# Altium PCB Board_Layout.PcbDoc (part 2 of 2)
Units mil, origin at the board's own origin, x right, y up, seen from the top; angles counter-clockwise.
Board outline 4005 x 2010 mil, 4 copper layers (Top Layer, Power, Ground, Bottom Layer); 140 components, 129 nets, 567 pads, 245 vias.
Unrouted connection lines stored in the file: 278.
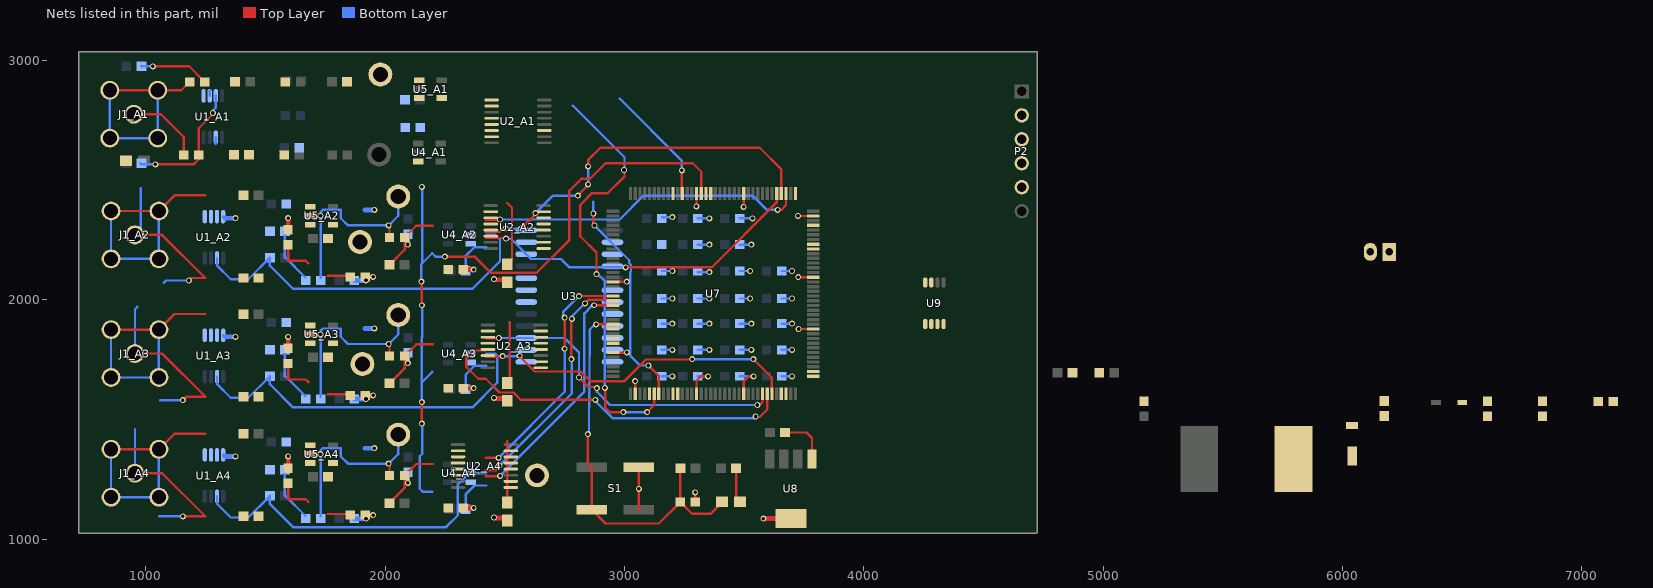
[diagram p4: the nets of this part, all layers, seen from the top]

## Via types
v1: diameter 25, hole 15, Top Layer to Bottom Layer, tented both sides, 89 vias
v2: diameter 25, hole 15, Ground to Bottom Layer, tented bottom, 55 vias
v3: diameter 25, hole 15, Top Layer to Ground, tented top, 39 vias
v4: diameter 25, hole 15, Top Layer to Power, tented top, 33 vias
v5: diameter 25, hole 15, Power to Bottom Layer, tented bottom, 29 vias

## Nets (pads, with @x,y where several pads share a name; then routed paths per layer and width w, separated by ;. In a path a pad name is that pad's centre, name@x,y a point inside that pad or via, vN(x,y) a via of type N, cw(c..) or ccw(c..) an arc to the next point about the centre after c; other vN are vias at no path point) (continued)
AGND_A2: C1_A2.1 C5_A2.1 C6_A2.1 C7_A2.1 C8_A2.1 D1_A2.1 R3_A2.1 T2_A2.1 U1_A2.4 U2_A2.2 U2_A2.4 U2_A2.5 U2_A2.6 U4_A2.2 U5_A2.2 | length 357.7
  Top Layer w20: C6_A2.1@1595,2292.01 v3(1595,2340.51) ; U5_A2.2@1687.76,2350.51 v3(1730,2350.51) ; C8_A2.1@1916.5,2095.51 v3(1950,2095.51) ; v3@2457.4,2083.11 D1_A2.1@2510,2083.11
  Bottom Layer w10: U1_A2.4@1323.39,2347.13 U1_A2.4@1330,2340.51
  Bottom Layer w20: U1_A2.4@1330,2340.51 v2(1375,2340.51) ; C7_A2.1@1871.5,2080.51 v2(1920,2080.51) ; 1915,2375 v2@1954.49,2375 ; v2@2095,2235.51 C1_A2.1@2095,2274.02
  other v2: 2095,2230.51 1955,2375.51
  other v3: 2455,2085.51
AGND_A3: C1_A3.1 C5_A3.1 C6_A3.1 C7_A3.1 C8_A3.1 D1_A3.1 R3_A3.1 T2_A3.1 U1_A3.4 U2_A3.2 U2_A3.4 U2_A3.5 U2_A3.6 U4_A3.2 U5_A3.2 | length 357.7
  Top Layer w20: C6_A3.1@1595,1796.5 v3(1595,1845) ; U5_A3.2@1687.76,1855 v3(1730,1855) ; C8_A3.1@1916.5,1600 v3(1950,1600) ; v3@2457.4,1587.6 D1_A3.1@2510,1587.6
  Bottom Layer w10: U1_A3.4@1323.39,1851.61 U1_A3.4@1330,1845
  Bottom Layer w20: U1_A3.4@1330,1845 v2(1375,1845) ; C7_A3.1@1871.5,1585 v2(1920,1585) ; 1915,1879.49 v2@1954.49,1879.49 ; v2@2095,1740 C1_A3.1@2095,1778.5
  other v2: 2095,1735 1955,1880
  other v3: 2455,1590
AGND_A4: C1_A4.1 C5_A4.1 C6_A4.1 C7_A4.1 C8_A4.1 D1_A4.1 R3_A4.1 T2_A4.1 U1_A4.4 U2_A4.2 U2_A4.4 U2_A4.5 U2_A4.6 U4_A4.2 U5_A4.2 | length 357.7
  Top Layer w20: C6_A4.1@1595,1296.5 v3(1595,1345) ; U5_A4.2@1687.76,1355 v3(1730,1355) ; C8_A4.1@1916.5,1100 v3(1950,1100) ; v3@2457.4,1087.6 D1_A4.1@2510,1087.6
  Bottom Layer w10: U1_A4.4@1323.39,1351.61 U1_A4.4@1330,1345
  Bottom Layer w20: U1_A4.4@1330,1345 v2(1375,1345) ; C7_A4.1@1871.5,1085 v2(1920,1085) ; 1915,1379.49 v2@1954.49,1379.49 ; v2@2095,1240 C1_A4.1@2095,1278.5
  other v2: 2095,1235 1955,1380
  other v3: 2455,1090
C\S\_\P\O\T\: U3.11 U7.100
NetC2_A1_1: C2_A1.1 J1_A1.2 | length 948
  Top Layer w10: J1_A1.2@850,2875 J1_A1.2@1050,2875 1148.5,2875 C2_A1.1@1183.5,2910
  Bottom Layer w10: J1_A1.2@850,2875 J1_A1.2@850,2675 J1_A1.2@1050,2675 J1_A1.2@1050,2875
NetC2_A1_2: C2_A1.2 R1_A1.2 U1_A1.2 | length 315.6
  Top Layer w10: v1(1030,2975) 1181.5,2975 1241.5,2915 C2_A1.2@1251.5,2915
  Bottom Layer w10: R1_A1.2@981.5,2975 v1(1030,2975) ; U1_A1.2@1267.2,2851.61 U1_A1.2@1267.2,2872.38
NetC2_A2_1: C2_A2.1 J1_A2.2 | length 1249.8
  Top Layer w10: J1_A2.2@855,2370.51 J1_A2.2@1055,2370.51 1120,2435.51 1248.5,2435.51
  Bottom Layer w10: J1_A2.2@855,2370.51 J1_A2.2@855,2170.51 J1_A2.2@1055,2170.51 J1_A2.2@1055,2370.51 ; 1581.5,2285.51 1581.5,2175.51 1583.5,2175.51 C2_A2.1@1666.5,2092.52
NetC2_A2_2: C2_A2.2 R1_A2.2 U1_A2.2 | length 799.2
  Top Layer w10: v1(2015,2310.51) 2018.5,2307.01 2018.5,2260.51
  Bottom Layer w10: C2_A2.2@1731.5,2090.51 1731.5,2367.01 1739.49,2375 1765,2375 1815,2375 1815,2340.51 1845,2310.51 v1(2015,2310.51) 2055,2350.51 2055,2431.5
NetC2_A3_1: C2_A3.1 J1_A3.2 | length 1249.8
  Top Layer w10: J1_A3.2@855,1875 J1_A3.2@1055,1875 1120,1940 1248.5,1940
  Bottom Layer w10: J1_A3.2@855,1875 J1_A3.2@855,1675 J1_A3.2@1055,1675 J1_A3.2@1055,1875 ; 1581.5,1790 1581.5,1680 1583.5,1680 C2_A3.1@1666.5,1597.01
NetC2_A3_2: C2_A3.2 R1_A3.2 U1_A3.2 | length 799.2
  Top Layer w10: v1(2015,1815) 2018.5,1811.5 2018.5,1765
  Bottom Layer w10: C2_A3.2@1731.5,1595 1731.5,1871.5 1739.49,1879.49 1765,1879.49 1815,1879.49 1815,1845 1845,1815 v1(2015,1815) 2055,1855 2055,1935.98
NetC2_A4_1: C2_A4.1 J1_A4.2 | length 1249.8
  Top Layer w10: J1_A4.2@855,1375 J1_A4.2@1055,1375 1120,1440 1248.5,1440
  Bottom Layer w10: J1_A4.2@855,1375 J1_A4.2@855,1175 J1_A4.2@1055,1175 J1_A4.2@1055,1375 ; 1581.5,1290 1581.5,1180 1583.5,1180 C2_A4.1@1666.5,1097.01
NetC2_A4_2: C2_A4.2 R1_A4.2 U1_A4.2 | length 799.2
  Top Layer w10: v1(2015,1315) 2018.5,1311.5 2018.5,1265
  Bottom Layer w10: C2_A4.2@1731.5,1095 1731.5,1371.5 1739.49,1379.49 1765,1379.49 1815,1379.49 1815,1345 1845,1315 v1(2015,1315) 2055,1355 2055,1435.98
NetC3_A1_1: C3_A1.1 J1_A1.1 | length 322.9
  Top Layer w10: J1_A1.1@950,2775 1063.5,2775 1158.5,2680 C3_A1.1@1158.5,2605
NetC3_A1_2: C3_A1.2 R2_A1.1 U1_A1.3 | length 545.6
  Top Layer w10: v1(1040,2565) 1200,2565 1221.5,2586.5 C3_A1.2@1221.5,2605 1221.5,2716.5 v1@1280,2775
  Bottom Layer w10: R2_A1.1@976.5,2570 981.5,2565 v1(1040,2565) ; v1(1280,2780) 1280,2790 1292.8,2802.8 U1_A1.3@1292.8,2851.61
NetC3_A2_1: C3_A2.1 J1_A2.1 | length 754.7
  Top Layer w10: J1_A2.1@955,2270.51 1068.5,2270.51 1248.5,2090.51 1190.51,2090.51 v1(1180,2080)
  Bottom Layer w10: J1_A2.1@955,2270.51 979.88,2295.39 979.88,2465 ; 1075.12,2070 1085.12,2080 v1(1180,2080)
NetC3_A2_2: C3_A2.2 R2_A2.1 U1_A2.3 | length 279.4
  Top Layer w10: 2018.5,2145.51 2081.5,2208.5 C3_A2.2@2081.5,2260.51 2129.88,2308.9 2199.76,2308.9
NetC3_A3_1: C3_A3.1 J1_A3.1 | length 761.8
  Top Layer w10: J1_A3.1@955,1775 1068.5,1775 1248.5,1595 1170,1595 v1(1155,1580)
  Bottom Layer w10: J1_A3.1@955,1775 955,1960.12 964.88,1970 ; 1060.12,1580 v1(1155,1580)
NetC3_A3_2: C3_A3.2 R2_A3.1 U1_A3.3 | length 279.4
  Top Layer w10: 2018.5,1650 2081.5,1712.99 C3_A3.2@2081.5,1765 2129.88,1813.39 2199.76,1813.39
NetC3_A4_1: C3_A4.1 J1_A4.1 | length 746.3
  Top Layer w10: J1_A4.1@955,1275 1068.5,1275 1248.5,1095 v1(1155,1095)
  Bottom Layer w10: J1_A4.1@955,1275 955,1459.88 ; 1055.12,1095 v1(1155,1095)
NetC3_A4_2: C3_A4.2 R2_A4.1 U1_A4.3 | length 279.4
  Top Layer w10: 2018.5,1150 2081.5,1212.99 C3_A4.2@2081.5,1265 2129.88,1313.39 2199.76,1313.39
NetC4_A1_2: C4_A1.2 R3_A1.2 U2_A1.3
NetC4_A2_2: C4_A2.2 R3_A2.2 U2_A2.3
NetC4_A3_2: C4_A3.2 R3_A3.2 U2_A3.3
NetC4_A4_2: C4_A4.2 R3_A4.2 U2_A4.3
NetC6_A1_2: C6_A1.2 R8_A1.2 U5_A1.1
NetC6_A2_2: C6_A2.2 R8_A2.2 U5_A2.1 | length 156.2
  Top Layer w10: C6_A2.2@1595,2229.02 1595,2162.01 1668.74,2162.01 1679.65,2151.1
NetC6_A3_2: C6_A3.2 R8_A3.2 U5_A3.1 | length 156.2
  Top Layer w10: C6_A3.2@1595,1733.5 1595,1666.5 1668.74,1666.5 1679.65,1655.59
NetC6_A4_2: C6_A4.2 R8_A4.2 U5_A4.1 | length 156.2
  Top Layer w10: C6_A4.2@1595,1233.5 1595,1166.5 1668.74,1166.5 1679.65,1155.59
NetC8_A1_2: C8_A1.2 U5_A1.4
NetC8_A2_2: C8_A2.2 U5_A2.4 | length 95
  Top Layer w10: 1760.35,2099.92 1849.09,2099.92 C8_A2.2@1853.5,2095.51
NetC8_A3_2: C8_A3.2 U5_A3.4 | length 95
  Top Layer w10: 1760.35,1604.41 1849.09,1604.41 C8_A3.2@1853.5,1600
NetC8_A4_2: C8_A4.2 U5_A4.4 | length 95
  Top Layer w10: 1760.35,1104.41 1849.09,1104.41 C8_A4.2@1853.5,1100
NetC38_1: C38.1 D6.C U9.1
NetC38_2: C38.2 D7.C L1.1 U9.3
NetC39_1: C39.1 U9.7
NetC39_2: C39.2 R17.1
NetD1_A1_2: D1_A1.2 R7_A1.2
NetD1_A2_2: D1_A2.2 R7_A2.2 | length 272.7
  Top Layer w10: D1_A2.2@2510,2147.91 2530,2167.91 2530,2384.02 2510,2404.02
NetD1_A3_2: D1_A3.2 R7_A3.2 | length 246.1
  Top Layer w10: D1_A3.2@2520,1660 2520,1906.1
NetD1_A4_2: D1_A4.2 R7_A4.2 | length 246.1
  Top Layer w10: D1_A4.2@2510,1162.4 2510,1408.5
NetD4_2: D4.2 R12.2 | length 146.6
  Top Layer w10: R12.2@3466.5,1295 3466.5,1170.91 D4.2@3482.4,1155
NetR5_A1_1: R5_A1.1 U4_A1.3
NetR5_A2_1: R5_A2.1 U4_A2.3 | length 163.6
  Bottom Layer w10: R5_A2.1@2336.5,2120.51 2336.5,2182.01 2373.82,2219.33 2423.19,2219.33
NetR5_A3_1: R5_A3.1 U4_A3.3 | length 163.6
  Bottom Layer w10: R5_A3.1@2336.5,1625 2336.5,1686.5 2373.82,1723.82 2423.19,1723.82
NetR5_A4_1: R5_A4.1 U4_A4.3 | length 163.6
  Bottom Layer w10: R5_A4.1@2336.5,1125 2336.5,1186.5 2373.82,1223.82 2423.19,1223.82
NetR8_A1_1: R8_A1.1 U5_A1.3
NetR8_A2_1: R8_A2.1 U5_A2.3
NetR8_A3_1: R8_A3.1 U5_A3.3
NetR8_A4_1: R8_A4.1 U5_A4.3
NetR9_2: R9.2 U3.10
NetR13_2: R13.2 U8.1 | length 209.3
  Top Layer w10: R13.2@3671.5,1445 3760,1445 3783.58,1421.42 U8.1@3783.58,1334.02
NetU2_A1_9: U2_A1.9
NetU2_A1_10: U2_A1.10
NetU2_A2_9: U2_A2.9
NetU2_A2_10: U2_A2.10
NetU2_A3_9: U2_A3.9
NetU2_A3_10: U2_A3.10
NetU2_A4_9: U2_A4.9
NetU2_A4_10: U2_A4.10
NetU7_26: U7.26
NetU7_28: U7.28
NetU7_29: U7.29
NetU7_37: 
NetU7_41: U7.41
NetU7_46: U7.46
NetU7_47: U7.47
NetU7_69: U7.69
NetU7_70: U7.70
NetU7_73: U7.73
NetU7_74: U7.74
NetU7_100: 
NetU7_135: U7.135
R\S\T\: C37.1 D4.1 P2.5 R11.2 S1.3 U7.25 | length 1648.2
  Top Layer w10: v1(2847.05,1437.95) 2847.05,1316.1 2863.15,1300 S1.3@2863.15,1122.83 2920.98,1065 3143.5,1065 C37.1@3233.5,1155 ; v1(2882.05,1897.05) U7.25@2951.69,1897.05 ; R11.2@3233.5,1295 C37.1@3233.5,1155 ; D4.1@3407.6,1155 3407.6,1152.6 3360,1105 3283.5,1105 C37.1@3233.5,1155
  Bottom Layer w10: v1@2852.05,1437.95 2855,1875 v1@2877.05,1897.05
R\S\T\_\P\O\T\: C11.2 C12.2 C13.2 C14.2 C15.2 C16.2 C17.2 C18.2 C19.2 C20.2 C21.2 C22.2 C23.2 C24.2 C25.2 C26.2 C27.2 C28.2 C29.2 C30.2 C31.2 C32.2 C33.2 C34.2 C35.2 C36.2 C37.2 C40.2 C41.2 D7.A P2.3 P3.2 R6.1 R17.2 S1.1 U2_A1.14 U2_A2.14 U2_A3.14 U2_A4.14 U3.9 U3.15 U7.16 U7.31 U7.38 U7.51 U7.61 U7.83 U7.94 U7.101 U7.107 U7.120 U7.130 U8.5 U9.4 U9.8 | length 2158.9
  Top Layer w10: U7.31@2951.69,1778.94 v3@3008.94,1778.94 ; U7.16@2951.69,2074.21 v3@3009.21,2074.21 ; v3(3045,1660) 3045.2,1659.8 U7.38@3045.2,1606.69 ; 3060,1122.83 S1.1@3060,1300 ; C37.2@3296.5,1155 v3@3296.5,1193.5 ; U7.51@3301.1,1606.69 3301.1,1661.1 3320,1680 v1(3350,1680) ; v3@3301.1,2390 U7.130@3301.1,2443.31 ; U7.61@3497.95,1606.69 3497.95,1657.95 3520,1680 v1@3535,1680 ; v3(3497.95,2387.95) U7.120@3497.95,2443.31 ; v3@3725.2,2349.8 U7.107@3788.31,2349.8 ; v3(3726.1,2093.9) U7.94@3788.31,2093.9 ; v3(3727.36,1877.36) U7.83@3788.31,1877.36
  Top Layer w20: v3@3580.98,1085.98 U8.5@3695,1085.98
  Bottom Layer w10: C36.2@3156.5,1680 v2(3200,1680) ; C35.2@3156.5,1790 v2(3200,1790) ; C34.2@3156.5,1900 v2(3200,1900) ; C33.2@3156.5,2005 v2(3200,2005) ; C32.2@3156.5,2120 v2(3200,2120) ; C30.2@3156.5,2345 v2(3200,2345) ; C29.2@3306.5,1680 v1(3350,1680) ; C28.2@3306.5,1790 v2(3355,1790) ; C27.2@3306.5,1900 v2(3355,1900) ; C26.2@3306.5,2005 v2(3355,2005) ; C25.2@3306.5,2115 v2(3355,2115) ; C24.2@3306.5,2230 v2(3355,2230) ; C23.2@3306.5,2340 v2(3355,2340) ; C22.2@3481.5,1680 v1(3540,1680) ; C21.2@3481.5,1790 v2(3530,1790) ; C20.2@3481.5,1900 v2(3530,1900) ; C19.2@3481.5,2005 v2(3525,2005) ; C18.2@3481.5,2120 v2(3525,2120) ; C17.2@3481.5,2230 v2(3530,2230) ; C16.2@3481.5,2340 v2(3535,2340) ; C15.2@3656.5,1680 v2(3700,1680) ; C14.2@3656.5,1790 v2(3700,1790) ; C13.2@3656.5,1900 v2(3700,1900) ; C12.2@3656.5,2005 v2(3700,2005) ; C11.2@3656.5,2120 v2(3700,2120)
  other v3: 3580,1085 3295,1195 3060,1210 3010,1780 3010,2075 3725,2350 3300,2390
RGA_1: U3.22 U3.23
RGA_2: U3.3 U3.4
RGA_3: U3.18 U3.19
RGA_4: U3.7 U3.8
RGA_A1: U1_A1.1
RGA_A2: U1_A2.1
RGA_A3: U1_A3.1
RGA_A4: U1_A4.1
RGB_1: U3.24
RGB_2: U3.2
RGB_3: U3.20
RGB_4: U3.6
RGB_A1: C4_A1.1 R4_A1.2 T1_A1.1 U1_A1.6 | length 26.2
  Bottom Layer w10: U1_A1.6@1292.8,2652.2 U1_A1.6@1292.8,2678.39
RGB_A2: C4_A2.1 R4_A2.2 T1_A2.1 U1_A2.6 | length 1594.1
  Top Layer w20: C4_A2.1@2326.5,2125.51 v3(2370,2125.51)
  Bottom Layer w10: U1_A2.6@1297.8,2173.9 1297.8,2142.72 1355,2085.51 1428.5,2085.51 1518.5,2175.51 1518.5,2142.01 1615,2045.51 2365,2045.51 2480,2160.51 2480,2250.51 2460,2270.51 2423.19,2270.51
RGB_A3: C4_A3.1 R4_A3.2 T1_A3.1 U1_A3.6 | length 1594.6
  Top Layer w20: C4_A3.1@2326.5,1630 v3(2370,1630)
  Bottom Layer w10: U1_A3.6@1297.8,1678.39 1297.8,1647.2 1355,1590 1428.5,1590 1518.5,1680 1518.5,1646.5 1615,1550 2365,1550 2468.54,1653.54 2468.54,1664.64 ; 2423.19,1775 2460,1775 2468.54,1766.46 2468.54,1754.64 2468.54,1664.64 ; 2468.54,1674.64 2468.54,1664.64
RGB_A4: C4_A4.1 R4_A4.2 T1_A4.1 U1_A4.6 | length 1503.9
  Top Layer w20: C4_A4.1@2326.5,1130 v3(2370,1130)
  Bottom Layer w10: U1_A4.6@1297.8,1178.39 1297.8,1147.2 1355,1090 1428.5,1090 1518.5,1180 1518.5,1146.5 1615,1050 2255,1050 2304.17,1099.17 2304.17,1229.17 2350,1275 2423.19,1275
SCK_ADC1: U2_A1.15 U7.133 | length 505.2
  Top Layer w10: v1(3240,2540) 3240,2445.35 U7.133@3242.05,2443.31
  Bottom Layer w10: 2980,2840 3240,2580 v1(3240,2540)
SCK_ADC2: U2_A2.15 U7.111 | length 1377.2
  Top Layer w10: 2420.24,2334.49 v1@2479.49,2334.49 ; v1(3640,2375) 3655,2375 3675.12,2395.12 U7.111@3675.12,2443.31
  Bottom Layer w10: v1(2480,2335) 2980,2335 3080,2435 3535,2435 3595,2375 v1(3640,2375)
SCK_ADC3: U2_A3.15 U7.65 | length 1379.5
  Top Layer w10: 2420.24,1838.98 v1@2473.98,1838.98 ; v1(2810,1675) 2850,1635 v1@2885,1635 ; v1(3555,1560) 3565,1560 3576.69,1571.69 U7.65@3576.69,1606.69
  Bottom Layer w10: v1(2475,1840) 2750,1840 2810,1780 v1(2810,1675) ; v1(2885,1630) 2885,1615 2940,1560 v1(3555,1560)
SCK_ADC4: U2_A4.15 U7.19 | length 1004.8
  Top Layer w10: 2420.24,1338.98 v1(2473.98,1338.98) ; v1(2750,1795) v1@2750,1915 ; v1@2810,2015.16 U7.19@2951.69,2015.16
  Bottom Layer w10: v1(2473.98,1338.98) 2750,1615 v1(2750,1795) ; v1(2750,1925) 2745,1930 2745,1950 v1(2810,2015)
SCK_POT: U3.14 U7.128
SDI_ADC1: U2_A1.12 U7.43 | length 939.2
  Top Layer w10: v1(2870,2360) 2870,2315 v1(2875,2310) ; v1(3100,1725) 3143.62,1681.38 U7.43@3143.62,1606.69
  Bottom Layer w10: v1(2870,2360) 2870,2410 ; v1(2875,2310) 3020,2165 3020,2151.82 3027.5,2144.32 3027.5,2118.18 3025,2115.68 3025,1765 3065,1725 v1(3100,1725)
SDI_ADC2: U2_A2.12 U7.113 | length 1416
  Top Layer w10: 2420.24,2257.72 2502.28,2257.72 v1(2505,2255) ; v1(3005,2135) 3365,2135 3635.75,2405.75 U7.113@3635.75,2443.31
  Bottom Layer w10: v1(2505,2255) 2525,2255 2610,2170 2735,2170 2770,2135 v1(3005,2135)
SDI_ADC3: U2_A3.12 U7.67 | length 1383.3
  Top Layer w10: 2420.24,1762.21 v1@2492.79,1762.21 ; v1(2562.21,1765.71) 2562.21,1762.79 2625,1700 2816.82,1700 2856.82,1660 3000,1660 3090,1750 v1@3285,1750 ; v1(3538.25,1751.75) 3616.06,1673.94 U7.67@3616.06,1606.69
  Bottom Layer w10: v1(2491.04,1763.96) v1@2563.96,1763.96 ; v1(3283.25,1751.75) v1(3538.25,1751.75)
SDI_ADC4: U2_A4.12 U7.21 | length 1021.1
  Top Layer w10: 2420.24,1262.21 v1@2482.21,1262.21 ; v1(2873.25,1976.75) 2950.73,1976.75 U7.21@2951.69,1975.79
  Bottom Layer w10: v1(2480.45,1263.96) 2832.5,1616 2832.5,1942.5 2865,1975 v1@2875,1975
SDI_POT: U3.12 U7.129 | length 3010.8
  Top Layer w10: v1(2153.25,1481.75) v1(2153.25,1571.75) ; v1(2153.25,1976.75) v1@2153.25,2073.25 ; v1(2250,2180) 2374.08,2180 2440.77,2113.31 2633.31,2113.31 2770,2250 2770,2455 2820,2505 2856.21,2505 2921.21,2570 3285,2570 3320.79,2534.21 U7.129@3320.79,2443.31
  Bottom Layer w10: v1(2151.5,2075) 2151.5,2148.43 2155,2151.93 ; v1(2153.25,1571.75) 2153.25,1654.67 ; v1@2155,1480 2155,1355.68 2145,1345.68 2145,1210 2156.77,1198.23 2196.81,1198.23 ; v1@2155,1975 2155,1845 2153.25,1843.25 2153.25,1654.67 ; v1@2155,2470 2155,2151.93 ; 2196.81,1698.23 2153.25,1654.67 ; v1(2250,2180) 2210.55,2180 2196.81,2193.74 2155,2151.93
  other v1: 2153.25,2471.75
SDO_ADC1: U2_A1.13 U7.42 | length 1777.2
  Top Layer w10: v1(2883.25,2106.75) 2883.25,2196.75 2815,2265 2815,2395 2865,2445 2930,2445 3000,2515 v1@3000,2540 ; v1@2920,1630 2920,1550 2940,1530 v1(2995,1530) ; v1(3095,1530) 3123.94,1558.94 U7.42@3123.94,1606.69
  Bottom Layer w10: 2784.02,2810.98 3000,2595 v1@3000,2543.5 ; v1@2885,2110 2918.25,2076.75 v1(2918.25,1631.75) ; v1(2995,1530) v1(3095,1530)
  other v1: 2998.25,2541.75
SDO_ADC2: U2_A2.13 U7.112 | length 1581.5
  Top Layer w10: 2420.24,2283.31 2478.31,2283.31 2490,2295 v1@2505,2295 ; v1(2568.25,2296.75) v1@2630,2358.5 ; v1(2805,2435) v1@2850,2480 ; v1(2848.25,2556.75) 2848.25,2583.25 2900,2635 3565,2635 3655.43,2544.57 U7.112@3655.43,2443.31
  Bottom Layer w10: v1(2503.25,2296.75) v1(2568.25,2296.75) ; v1(2628.25,2361.75) 2701.5,2435 v1(2805,2435) ; v1(2848.25,2481.75) v1(2848.25,2556.75)
SDO_ADC3: U2_A3.13 U7.66 | length 1557.5
  Top Layer w10: 2420.24,1787.8 2372.8,1787.8 2338.57,1753.57 2338.57,1720 2389.04,1669.53 2420.47,1669.53 2477.8,1612.2 2535.8,1612.2 2566.25,1581.75 v1(2878.25,1581.75) ; v1@3550,1510 3565,1510 3596.38,1541.38 U7.66@3596.38,1606.69
  Bottom Layer w10: v1(2878.25,1581.75) 2878.25,1576.75 2950,1505 v1@3550,1505
  other v1: 3548.25,1511.75
SDO_ADC4: U2_A4.13 U7.20 | length 1008.9
  Top Layer w10: 2420.24,1287.8 2462.8,1287.8 v1@2480,1305 ; v1(2778.25,1751.75) v1@2778.25,1913.57 ; v1(2835,1985) 2849.25,1999.25 2919.99,1999.25 2920.98,1998.27 2948.9,1998.27 U7.20@2951.69,1995.47
  Bottom Layer w10: v1(2478.25,1306.75) 2780,1608.5 v1@2780,1750 ; v1(2780,1920) 2780,1930 v1(2835,1985)
SDO_POT: U3.13 U7.127
SWCLK: P2.2 U7.109
SWDIO: P2.4 U7.105
VIN: C41.1 P3.1 U9.2
pads on no net: P2.6 U1_A1.8 U1_A2.8 U1_A3.8 U1_A4.8 U2_A1.8 U2_A2.8 U2_A3.8 U2_A4.8 U3.1 U3.5 U3.17 U3.21 U7.1 U7.2 U7.3 U7.4 U7.5 U7.7 U7.8 U7.9 U7.10 U7.11 U7.12 U7.13 U7.14 U7.15 U7.18 U7.22 U7.23 U7.24 U7.27 U7.32 U7.33 U7.40 U7.44 U7.45 U7.48 U7.49 U7.50 U7.53 U7.54 U7.55 U7.56 U7.57 U7.58 U7.59 U7.60 U7.63 U7.64 U7.68 U7.71 U7.75 U7.76 U7.77 U7.78 U7.79 U7.80 U7.81 U7.82 U7.85 U7.86 U7.87 U7.88 U7.89 U7.90 U7.91 U7.92 U7.93 U7.96 U7.97 U7.98 U7.99 U7.102 U7.103 U7.104 U7.106 U7.110 U7.114 U7.115 U7.116 U7.117 U7.118 U7.119 U7.122 U7.123 U7.124 U7.125 U7.126 U7.132 U7.134 U7.136 U7.137 U7.138 U7.139 U7.140 U7.141 U7.142 U7.143 U8.2 U9.5
copper on no net: | length 19917.3
  Top Layer w10: 1311.5,1095 1408.5,1095 1405,1098.5 v1(1405,1255) ; 1311.5,1440 1311.5,1418.5 v1(1355,1375) 1408.5,1428.5 1408.5,1440 ; 1311.5,1595 1408.5,1595 1405,1598.5 v1(1405,1755) ; 1311.5,1940 1311.5,1918.5 v1(1355,1875) 1408.5,1928.5 1408.5,1940 ; 1311.5,2090.51 1408.5,2090.51 1405,2094.02 v1(1405,2250.51) ; 1311.5,2435.51 1311.5,2414.02 v1(1355,2370.51) 1408.5,2424.02 1408.5,2435.51 ; 1595,1103.5 1678.74,1103.5 1679.65,1104.41 ; 1595,1603.5 1678.74,1603.5 1679.65,1604.41 ; 1595,2099.02 1678.74,2099.02 1679.65,2099.92 ; 1687.76,1317.6 1698.5,1306.85 1698.5,1260 ; 1687.76,1817.6 1698.5,1806.85 1698.5,1760 ; 1687.76,2313.11 1698.5,2302.36 1698.5,2255.51 ; 1761.5,1260 1761.5,1296.85 1782.24,1317.6 ; 1761.5,1760 1761.5,1796.85 1782.24,1817.6 ; 1761.5,2255.51 1761.5,2292.36 1782.24,2313.11 ; 1782.24,1392.4 1887.6,1392.4 1955,1325 1955,1155 2020,1090 2110,1090 2155,1135 ; 1782.24,1892.4 1887.6,1892.4 1955,1825 1955,1655 2020,1590 2110,1590 2155,1635 ; 1782.24,2387.91 1887.6,2387.91 1955,2320.51 1955,2150.51 2020,2085.51 2110,2085.51 2155,2130.51 ; 2199.76,1211.02 2166.02,1211.02 2155,1200 2155,1135 ; 2199.76,1287.8 2232.8,1287.8 ; 2199.76,1338.98 2238.98,1338.98 ; 2199.76,1711.02 2166.02,1711.02 2155,1700 2155,1635 ; 2199.76,1787.8 2232.8,1787.8 ; 2199.76,1838.98 2238.98,1838.98 ; 2199.76,2206.54 2161.02,2206.54 2155,2200.51 2155,2130.51 ; 2199.76,2283.31 2232.8,2283.31 ; 2199.76,2334.49 2238.98,2334.49 ; v1(2243.25,1726.75) 2290,1726.75 ; v1@2245,1226.02 2266.02,1226.02 2293.19,1253.19 2293.19,1723.56 2290,1726.75 ; v1(2249.33,2219.33) 2310,2280 ; 2263.5,1130 2160,1130 2155,1135 ; 2263.5,1630 2160,1630 2155,1635 ; 2263.5,2125.51 2160,2125.51 2155,2130.51 ; 2290,2560 2330,2520 ; v1(2303.25,2081.75) 2303.25,1740 2290,1726.75 ; v1@2310,2200 2310,2280 ; v1(2330,1785) 2358.39,1813.39 2420.24,1813.39 ; v1(2360,2260) 2360,2290 2378.9,2308.9 2420.24,2308.9 ; v1(2365,1255) 2365,1300 2378.39,1313.39 2420.24,1313.39 ; 2420.24,1364.57 v4@2420.24,1384.76 ; 2420.24,1864.57 v4@2420.24,1889.76 ; 2420.24,2360.08 2420.24,2405.24 2440,2425 v4(2460,2425) ; 3340.47,2443.31 3340.47,2544.53 3300,2585 2915,2585 2850,2520 2330,2520 ; 2310,2280 2310,2500 2330,2520
  Top Layer w20: 1679.65,1130 v3(1710,1130) ; 1679.65,1630 v3(1710,1630) ; 1679.65,2125.51 v3(1710,2125.51) ; 1760.35,1155.59 v4(1799.41,1155.59) ; 1760.35,1655.59 v4(1799.41,1655.59) ; 1760.35,2151.1 v4(1799.41,2151.1) ; 1782.24,1317.6 v4@1809.84,1290 ; 1782.24,1817.6 v4@1809.84,1790 ; 1782.24,2313.11 v4@1809.84,2285.51 ; 2220,1240 2220,1291.18 ; 2220,1740 2220,1791.18 ; 2220,2235 2220,2286.18 ; 2232.8,1287.8 v3@2257.8,1287.8 ; 2232.8,1787.8 v3@2257.8,1787.8 ; 2232.8,2283.31 v3@2257.8,2283.31 ; 2238.98,1338.98 v3(2263.98,1338.98) ; 2238.98,1838.98 v3(2263.98,1838.98) ; 2238.98,2334.49 v3(2263.98,2334.49) ; v4(2451.5,1471.5) 2510,1471.5 ; v4(2451.5,1971.5) 2510,1971.5 ; v4(2451.5,2467.01) 2510,2467.01
  Power w20: v4(2420,1385) v4(2775,1385) ; v4(2420,1890) v4(2805,1890) ; v4(2460,2425) 2705,2425 v4(2765,2485)
  Ground w20: v1(2330,1785) 2336.46,1791.46 2501.46,1791.46 2501.46,1795.35 2556.11,1850 v2@2800,1850 ; v1(2360,2260) 2360,2285 2431.2,2356.2 2434.58,2356.2 2483.38,2405 v2@2790,2405 ; v1(2365,1255) 2365,1285 2510,1430 v2@2775,1430
  Bottom Layer w10: v2(890,1095) 944.88,1095 ; v2(890,1580) 949.88,1580 ; v2(905,2070) 964.88,2070 ; 1060.12,1465 v2(1125,1465) ; 1075.12,1970 v2(1135,1970) ; 1090.12,2465 v2(1150,2465) ; 1165,1306.5 1210.12,1351.61 1246.61,1351.61 1246.61,1411.61 1340,1505 2210,1505 2285,1430 2285,1365 2349.41,1300.59 2423.19,1300.59 ; 1165,1806.5 1210.12,1851.61 1246.61,1851.61 1246.61,1911.61 1340,2005 2210,2005 2285,1930 2285,1865 2349.41,1800.59 2423.19,1800.59 ; 1165,2302.01 1210.12,2347.13 1246.61,2347.13 1246.61,2407.13 1340,2500.51 2210,2500.51 2285,2425.51 2285,2360.51 2349.41,2296.1 2423.19,2296.1 ; 1272.2,1351.61 1276.94,1356.35 1276.94,1379.94 1289.16,1392.16 1332.03,1392.16 1349.18,1375 v1(1355,1375) ; 1272.2,1851.61 1276.94,1856.35 1276.94,1879.94 1289.16,1892.16 1332.03,1892.16 1349.18,1875 v1(1355,1875) ; 1272.2,2347.13 1276.94,2351.86 1276.94,2375.45 1289.16,2387.67 1332.03,2387.67 1349.18,2370.51 v1(1355,2370.51) ; 1297.8,1351.61 1297.8,1317.2 1360,1255 v1(1405,1255) ; 1297.8,1851.61 1297.8,1817.2 1360,1755 v1(1405,1755) ; 1297.8,2347.13 1297.8,2312.72 1360,2250.51 v1(1405,2250.51) ; 1518.5,1290 1518.5,1303.5 1586.5,1371.5 1586.5,1405 1625,1405 1705,1485 1825,1485 1865,1445 1865,1379.49 ; 1518.5,1790 1518.5,1803.5 1586.5,1871.5 1586.5,1905 1625,1905 1705,1985 1825,1985 1865,1945 1865,1879.49 ; 1518.5,2285.51 1518.5,2299.02 1586.5,2367.01 1586.5,2400.51 1625,2400.51 1705,2480.51 1825,2480.51 1865,2440.51 1865,2375 ; 2196.81,1223.82 v1@2243.82,1223.82 ; 2196.81,1275 2255,1275 2273.5,1256.5 2273.5,1125 ; 2196.81,1723.82 v1@2243.82,1723.82 ; 2196.81,1775 2255,1775 2273.5,1756.5 2273.5,1625 ; 2196.81,2219.33 v1(2249.33,2219.33) ; 2196.81,2270.51 2255,2270.51 2273.5,2252.01 2273.5,2120.51 ; v1@2305.83,2080.83 2305.83,2199.33 v1(2308.25,2201.75) ; v1(2330,1785) 2330,1780 2360.59,1749.41 2423.19,1749.41 ; v1(2360,2260) 2375.08,2244.92 2423.19,2244.92 ; v1(2365,1255) 2370.59,1249.41 2423.19,1249.41 ; 2423.19,1351.77 2423.19,1361.81 ; 2423.19,1851.77 2423.19,1861.81 ; 2423.19,2347.28 2423.19,2357.32
  Bottom Layer w20: v2(1475,1375) 1475,1454.13 ; v2(1475,1875) 1475,1954.13 ; v2(1475,2370.51) 1475,2449.65 ; 2418.19,2861.81 v2(2418.19,2888.19) ; 2423.19,1361.81 v2(2423.19,1388.19) ; 2423.19,1861.81 v2(2423.19,1888.19) ; 2423.19,2357.32 v2(2423.19,2383.7)
  other v1: 2243.25,1226.75
  other v2: 2778.19,1433.19 2798.19,1848.19 2788.19,2403.7
  other v3: 2260,1290 2260,1790 2260,2285.51 2787.2,2912.2
  other v4: 1810,1290 1810,1790 1810,2285.51

## Polygon pours and split planes (outlines as drawn)
4.2V_A4 on Power "4.2V_A4" (solid, pour order 14): 800,1515 2735,1515 2735,1055 800,1055 800,1515
4.2V_A3 on Power "4.2V_A3" (solid, pour order 10): 800,2015 2735,2015 2735,1535 800,1535 800,2015
4.2V_A2 on Power "4.2V_A2" (solid, pour order 6): 800,2510 2735,2510 2735,2030 800,2030 800,2510
4.2V_A1 on Power "4.2V_A1" (solid, pour order 2): 795,3015 2735,3015 2735,2535 800,2535 800,3010 795,3015
AGND_A4 on Ground "AGND_A4" (solid, pour order 16): 800,1515 2735,1515 2735,1050 800,1050 800,1515
AGND_A3 on Ground "AGND_A3" (solid, pour order 12): 800,2015 2735,2015 2735,1535 800,1535 800,2015
AGND_A2 on Ground "AGND_A2" (solid, pour order 8): 800,2510 2735,2510 2735,2020 800,2020 800,2510
AGND_A1 on Ground "AGND_A1" (solid, pour order 4): 800,3015 2735,3015 2735,2535 800,2535 800,3015

## Silkscreen, mask and mechanical layers (free items; w line width, h text height)
Top Overlay:
  lines w10: 700,1085 720,1025 ; 700,2965 720,3025 ; 710,1025 730,1025 ; 710,3025 730,3025 ; 720,1744.09 720,1025 ; 720,2305.91 720,3025 ; 730,1015 730,1035 ; 740,1085 720,1025 ; 740,2965 720,3025 ; 790,1005 730,1025 ; 790,1045 730,1025 ; 2449.09,1025 730,1025 ; 3010.91,1025 4730,1025 ; 4670,1005 4730,1025 ; 4670,1045 4730,1025 ; 4730,1015 4730,1035 ; 795,1525 795,1050 2740,1050 2740,1525 ; 795,1525 2740,1525 ; 795,1525 795,2025 ; 795,2025 795,2525 ; 795,2025 2740,2025 ; 795,2525 2740,2525 ; 795,2525 795,3025 2740,3025 2740,2525 ; 2740,1525 2740,2025 ; 2740,2025 2740,2525
  text "2000 (mil)" at 755.99,1754.09 h60 r90
  text "Reset" at 2895,1360 h60
  text "4000 (mil)" at 2459.09,989.01 h60
Bottom Overlay:
  lines w10: 795,1525 2740,1525 ; 795,2025 2740,2025 ; 795,2525 2740,2525 ; 795,1050 2740,1050 2740,3025 795,3025 795,1050